# Altium PCB HandHeld_Terminal_V2.PcbDoc (part 2 of 2)
Units mil, origin at the board's own origin, x right, y up, seen from the top; angles counter-clockwise.
Board outline 1653.54 x 2401.57 mil, 4 copper layers (Top Layer, GND_02, PWR_03, Bottom Layer), stack 23.756 mil thick; 120 components, 79 nets, 410 pads, 246 vias.
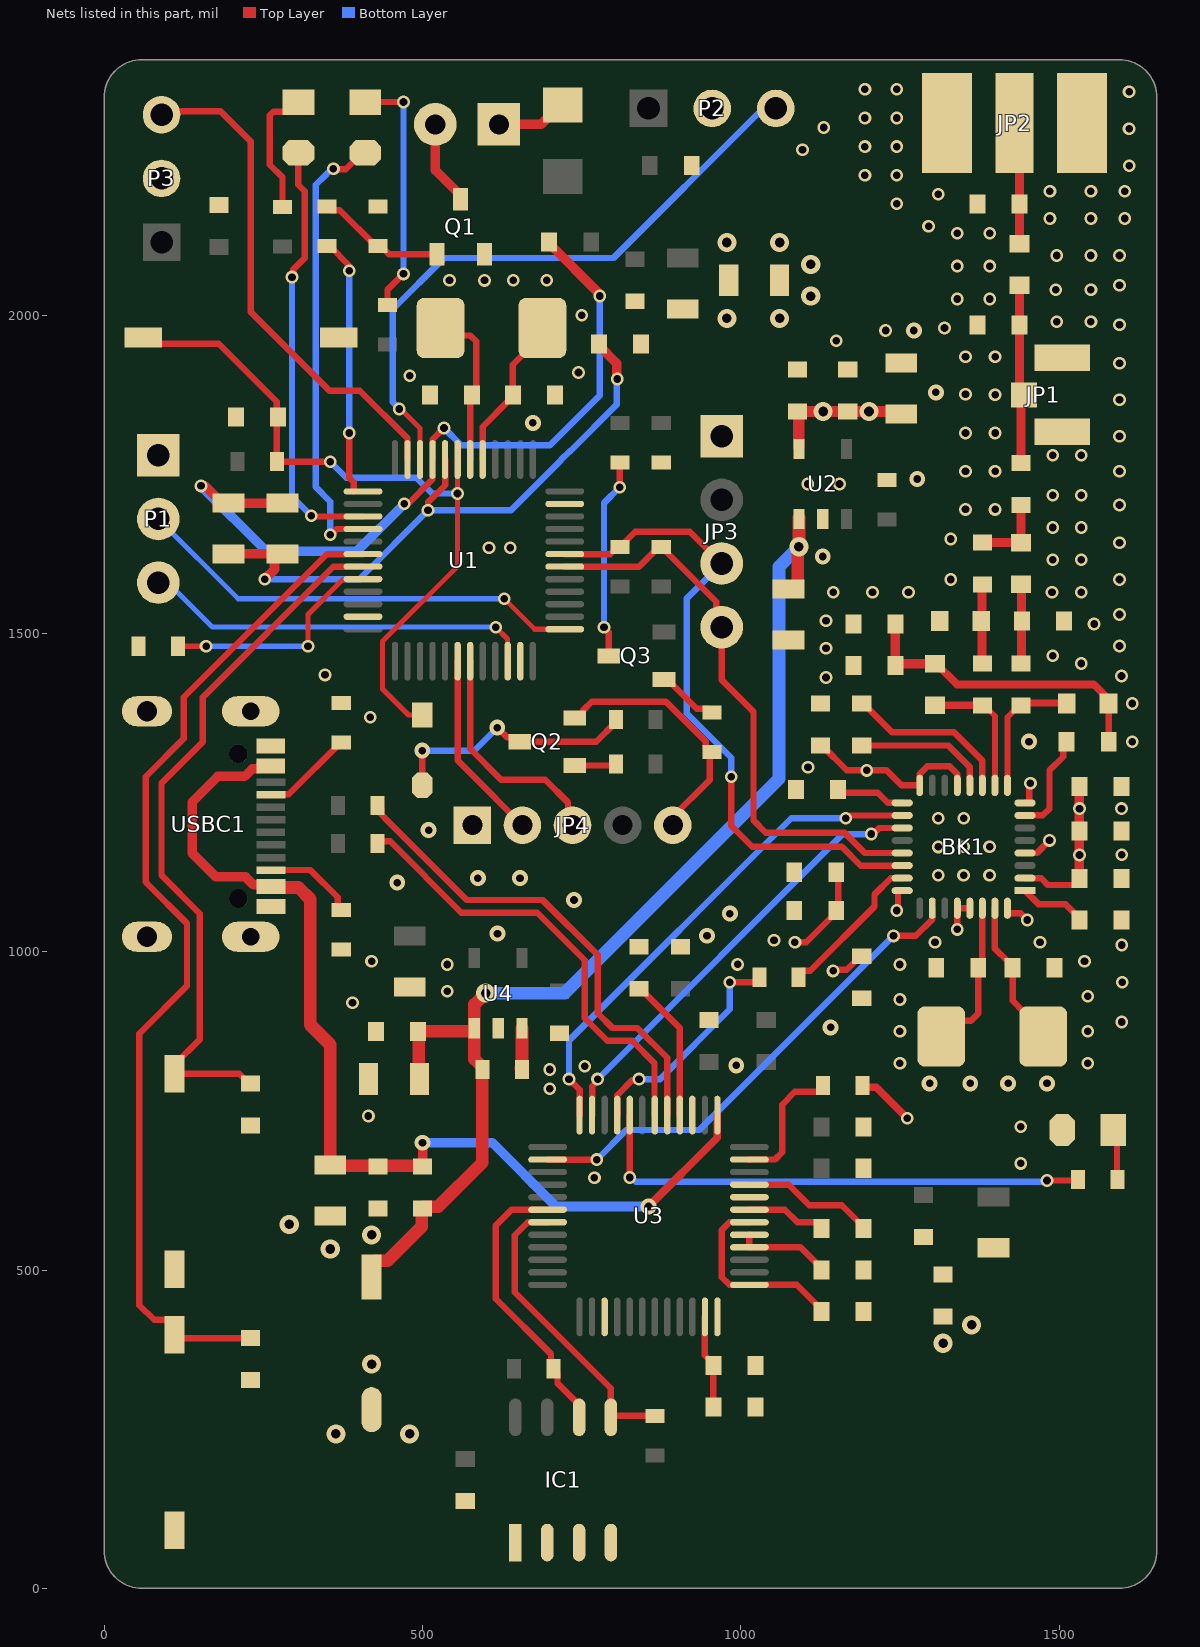
[diagram p4: the nets of this part, all layers, seen from the top]

## Via types
v1: diameter 20, hole 12, Top Layer to Bottom Layer, tented both sides, 201 vias
v2: diameter 25, hole 12, Top Layer to Bottom Layer, tented both sides, 27 vias
v3: diameter 30, hole 15, Top Layer to Bottom Layer, tented both sides, 18 vias

## Nets (pads, with @x,y where several pads share a name; then routed paths per layer and width w, separated by ;. In a path a pad name is that pad's centre, name@x,y a point inside that pad or via, vN(x,y) a via of type N, cw(c..) or ccw(c..) an arc to the next point about the centre after c; other vN are vias at no path point) (continued)
GND: C1.1 C4.1 C11.1 C12.1 C25.1 C26.1 C27.1 C28.1 C29.1 C37.1 C40.2 C41.2 C43.1 C45.1 C49.2 C50.2 C51.2 C52.2 C53.1 C58.1 FB3.1 FB5.1 FB7.1 IC1.1 IC1.2 IC1.3 IC1.4 JP3.1 JP4.1 LED4.2 P1.1 P2.2 P3.2 Q1.2 R3.2 R7.1 R9.2 R18.2 R19.2 R20.1 SW1.2 SW2.2 SW3.1 U1.23 U1.35 U1.47 U3.3 U4.2 USBC1.0 USBC1.A1 USBC1.A12 USBC1.B1 USBC1.B12 | length 91.7
  Top Layer w12: R19.2@1191,790 1193.97,787.03 1212.97,787.03 v1(1261.41,738.59)
  other v1: 770,645 1440,667.59 1440,725 415,742 700,784.74 700,815 755,820 390,920 538.88,937.95 538.88,980 994.99,980.2 420,985 417.76,1368.29 346.69,1435 604.37,1634.68 637.83,1634.68 480,1905 745,1910 750,2000 542.41,2055 597.4,2054.8 642.45,2055 695,2055
  other v2: 992.8,821.58 947,1025.2 617.71,1028.58 982.74,1060 738,1081.42 460.31,1108.77 586.87,1115.73 653.18,1115.73 509.58,1191.14 673.27,1831
  other v3: 363.84,242.62 479.65,242.62 420,352.13 1317.75,385 1362.75,413.93 355,533.12 420,555.22 290.58,571.73 978.28,1995 978.28,2114.35
GNDA: C38.1 C39.1 C44.1 C46.1 C47.1 C48.1 C54.1 C55.1 FB7.2 U3.27 U3.36 U3.44
GNDRF: "BK1. " C2.1 C3.1 C5.1 C6.1 C7.1 C8.1 C17.2 C18.2 C19.2 C20.2 C21.2 C23.1 C24.2 C32.1 C33.1 C34.1 C35.2 C36.2 C56.2 C57.1 FB5.2 JP1.2 JP1.3 JP2.2 JP2.3 L5.1 R14.1 U2.2
  other v1: 1250,825 1545,825 1250,875 1545,875 1598.5,889.76 1250,925 1545,930 1599.37,952 1250,980 1540,985 1598.5,1010.77 1305,1015 1470,1015 1052.13,1018.12 1309.99,1120.21 1350,1120.21 1390.88,1120.21 1598.5,1152.5 1309.99,1164.8 1350,1165 1390.88,1165 1310.33,1210 1350.35,1210 1598,1225 1105.49,1290 1615,1330.16 1615,1390 1133.78,1430.9 1598,1433.25 1535,1453 1490,1465 1133.78,1476.82 1595,1480.5 1555,1515 1133.78,1520 1595,1530 1145.15,1565 1207,1565 1263.5,1565 1488.8,1565 1535,1565 1330,1585 1595,1585 1490,1615.75 1535,1615.75 1595,1642.84 1330,1648.58 1490,1666.5 1535,1666.5 1353,1695 1399.5,1695 1595,1702 1490,1717.25 1535,1717.25 1105,1735 1155,1735 1353,1755 1399.5,1755 1595,1755 1490,1780 1535,1780 1595,1810 1353,1815 1399.5,1815 1595,1867.23 1399.5,1875.26 1353,1876.08 1595,1924.45 1353,1935 1399.5,1935 1150,1960 1227.46,1976 1320,1980 1595,1985 1496.29,1990 1550,1990 1340,2025.54 1391.18,2025.54 1495,2040 1550,2040 1595,2047.32 1340,2077.27 1391.18,2077.27 1496.29,2094 1550,2094 1595,2094 1340,2129 1391.18,2129 1295,2140 1485.63,2152 1550,2152 1603.27,2152 1245,2175 1310,2190 1485.63,2195 1550,2195 1603.27,2195 1195,2219.98 1245,2220.01 1610.24,2235 1096.93,2260 1195,2264.99 1245,2265.01 1610,2293.14 1130.41,2294.97 1195,2309.99 1245,2310.02 1610,2351.28 1195,2355 1245,2355.03
  other v2: 1296.57,793.25 1360.5,793.25 1420,793.25 1481.13,793.25 1141.18,881.24 1452.7,1330.16 1128.78,1621.12 1277.15,1742.87 1306.35,1878.96 1271.83,1976
  other v3: 1061,1995 1109.92,2030 1109.92,2080 1061,2114.35
LED1: LED2.2 U1.15 | length 676.8
  Top Layer w10: v1(295,2060) 296.91,2061.91 296.91,2071.91 315,2090 315,2195 305,2205 LED2.2@305,2255 ; v1(325,1685) 326.02,1683.98 406.46,1683.98 U1.15@406.54,1683.9
  Bottom Layer w10: v1(295,2060) 295,1715 v1(325,1685)
LED3: LED3.2 U1.16 | length 714.1
  Top Layer w10: v1(355,1655) 356.26,1655 365.48,1664.21 U1.16@406.54,1664.21 ; v1(360,2230) 360.61,2229.39 379.39,2229.39 405,2255 LED3.2@410,2255
  Bottom Layer w10: v1(355,1655) 355,1707.12 332,1730.12 332,2205 340.94,2213.94 341.24,2213.94 357.29,2230 v1(360,2230)
NetBK1_1: BK1.1 C7.2 | length 106.1
  Top Layer w10: BK1.1@1446.5,1096.08 1467.58,1075 1509.5,1075 1532,1052.5 C7.2@1532,1050
NetBK1_7: BK1.7 FB1.2 | length 159.1
  Top Layer w10: BK1.7@1446.5,1214.22 1446.66,1214.38 1474.38,1214.38 1485,1225 1485,1285 1506.64,1306.64 1506.64,1324.64 FB1.2@1512,1330
NetBK1_9: BK1.9 C10.1 L1.1 | length 211.3
  Top Layer w9: BK1.9@1418.91,1261.5 1418.91,1368.41 C10.1@1437.5,1387
  Top Layer w11: C10.1@1437.5,1387 C10.1@1440,1387 1444,1391 1508.32,1391 L1.1@1512.32,1395
NetBK1_10: BK1.10 C16.1 L2.1 | length 210.1
  Top Layer w9: C16.1@1382.5,1387 1399.23,1370.28 BK1.10@1399.23,1261.5
  Top Layer w11: L2.1@1305,1387.32 L2.1@1305.16,1387.16 ; C16.1@1379.84,1387.16 C16.1@1380,1387 C16.1@1382.5,1387
  Top Layer w12: L2.1@1305.16,1387.16 C16.1@1379.84,1387.16
NetBK1_11: BK1.11 C22.1 | length 265.6
  Top Layer w10: C22.1@1190,1390.13 1192.5,1390.13 1237.63,1345 1335,1345 1379.38,1300.62 1379.38,1261.66 BK1.11@1379.54,1261.5
NetBK1_12: BK1.12 C22.2 | length 212.6
  Top Layer w10: C22.2@1190,1324.13 1325.87,1324.13 1359.69,1290.31 1359.69,1261.66 BK1.12@1359.85,1261.5
NetBK1_17: BK1.17 C33.2 | length 97.2
  Top Layer w10: C33.2@1163,1250 1215,1250 1231.09,1233.91 BK1.17@1253.5,1233.91
NetBK1_30: BK1.30 C21.1 Y1.2 | length 237.7
  Top Layer w10: Y1.2@1315,865 1341.64,891.64 1361.64,891.64 1373,903 C21.1@1373,975 ; Y1.2@1339.79,876.27 Y1.2@1341.25,876.94 ; C21.1@1375,980 1379.38,984.38 1379.38,1068.34 BK1.30@1379.54,1068.5
NetBK1_31: BK1.31 C20.1 Y1.1 | length 174.6
  Top Layer w10: BK1.31@1399.23,1068.5 1399.23,1005.28 1420,984.5 C20.1@1420,980 ; C20.1@1427,975 1427,923 Y1.1@1445,905
NetC1_2: C1.2 SW1.1 U1.18 | length 1615.7
  Top Layer w10: C1.2@230,393 115.54,393 SW1.1@110,398.54 110,409.98 98.25,421.73 78.27,421.73 55,445 55,871.42 130,946.42 130,1044.54 67,1107.54 67,1108 65,1110 65,1275 125,1335 125,1400 349.49,1624.49 406.18,1624.49 U1.18@406.54,1624.84
NetC2_2: C2.2 C3.2 FB1.1 L1.2 L2.2 | length 490.8
  Top Layer w10: C2.2@1243,1450 C2.2@1245.68,1452.68 ; L2.2@1305,1452.68 L2.2@1306.97,1452.68 ; L1.2@1577.84,1396.81 1577.84,1330.16 FB1.1@1578,1330
  Top Layer w12: L2.2@1306.97,1452.68 1339.65,1420 1554.65,1420 L1.2@1577.84,1396.81
  Top Layer w15: C2.2@1243,1450 C3.2@1243,1514.8 ; C2.2@1245.68,1452.68 L2.2@1305,1452.68
NetC4_2: C4.2 SW2.1 U1.19 | length 1122.8
  Top Layer w10: C4.2@230,793 227.5,793 211.96,808.54 SW2.1@110,808.54 110,822.32 150,862.32 150,1060 90,1120 90,1265 155,1330 155,1400 359.8,1604.8 406.18,1604.8 U1.19@406.54,1605.16
NetC8_2: C8.2 C10.2 L4.2 | length 126
  Top Layer w11: C10.2@1440,1453 C10.2@1441,1454 ; L4.2@1440,1577.32 L4.2@1441,1576.32 ; C8.2@1441,1519 C8.2@1442,1520 C8.2@1441,1521
  Top Layer w14: C10.2@1441,1454 C8.2@1441,1519 ; C8.2@1441,1521 L4.2@1441,1576.32
NetC9_1: C9.1 C15.2 L4.1 | length 119.5
  Top Layer w11: C15.2@1380,1643 C15.2@1380.16,1642.84 ; L4.1@1439.84,1642.84 L4.1@1440,1642.68
  Top Layer w14: C15.2@1380.16,1642.84 L4.1@1439.84,1642.84 ; L4.1@1440,1642.68 C9.1@1440,1702
NetC9_2: C9.2 C18.1 JP1.1 L3.2 | length 294.2
  Top Layer w11: JP1.1@1440,1870.04 JP1.1@1444.96,1875 ; JP1.1@1453,1886.96 JP1.1@1460,1879.96
  Top Layer w14: JP1.1@1438,1881.96 L3.2@1438,2047.32 ; C9.2@1440,1768 JP1.1@1440,1870.04
  Top Layer w15: JP1.1@1438,1881.96 JP1.1@1444.96,1875
NetC15_1: C15.1 C16.2 L5.2 | length 125.9
  Top Layer w11: C16.2@1378.84,1454.16 C16.2@1380,1453 ; L5.2@1378.84,1518.84 L5.2@1377.68,1520 L5.2@1378.84,1521.16 ; C15.1@1378.84,1575.84 C15.1@1380,1577
  Top Layer w14: C16.2@1378.84,1454.16 L5.2@1378.84,1518.84 ; L5.2@1378.84,1521.16 C15.1@1378.84,1575.84
NetC17_1: C17.1 JP2.1 L3.1 | length 193.5
  Top Layer w14: L3.1@1438,2114.68 JP2.1@1438,2294
  Top Layer w15: JP2.1@1430,2302 JP2.1@1438,2294 ; L3.1@1438,2114.68 L3.1@1440,2112.68
NetC25_2: C25.2 U1.5 Y2.2 | length 237.5
  Top Layer w10: U1.5@594.53,1773.46 594.53,1825.03 635,1865.5 C25.2@635,1870 ; C25.2@642,1875 642,1922 688.33,1968.33 Y2.2@688.33,1980
NetC29_2: C29.2 U1.6 Y2.1 | length 251.3
  Top Layer w10: Y2.1@528.33,1980 540,1968.33 574.97,1968.33 584.3,1959 584.3,1885 578,1877.5 C29.2@578,1875 ; U1.6@574.84,1773.46 574.84,1869.34 C29.2@578,1872.5
NetC42_1: C42.1 U3.43 | length 127.4
  Top Layer w10: U3.43@1013.46,594.84 1069.32,594.84 1089.16,575 1119.5,575 1127,567.5 C42.1@1127,565
NetC42_2: C42.2 U3.45 | length 209.7
  Top Layer w10: U3.45@1013.46,634.21 1075.4,634.21 1107.62,602 1158.5,602 1193,567.5 C42.2@1193,565
NetC44_2: C44.2 U3.37 U3.42 | length 303.4
  Top Layer w10: U3.42@1013.46,575.16 1013.39,575.08 982.14,575.08 969.95,562.9 969.95,488.99 982.14,476.81 1013.39,476.81 U3.37@1013.46,476.73 1087.77,476.73 1127,437.5 C44.2@1127,435
NetC45_2: C45.2 U3.4 | length 226.6
  Top Layer w10: C45.2@840,942 842.5,942 904.21,880.29 U3.4@904.21,743.46
NetC46_2: C46.2 U3.40 U3.41 | length 149.5
  Top Layer w10: U3.41@1013.46,555.47 U3.40@1013.46,535.79 1033.15,535.79 1093.71,535.79 1127,502.5 C46.2@1127,500
NetC47_2: C47.2 C48.2 U3.35 | length 147.1
  Top Layer w10: U3.35@943.58,426.54 943.58,365.92 957,352.5 C48.2@957,350 C47.2@957,285
NetD1_2: D1.2 Q2.3 R11.2 | length 393.5
  Top Layer w10: D1.2@499.58,1261.63 v2@499.58,1309.75 ; v2(617.32,1352.18) 632.69,1336.81 645.94,1336.81 Q2.3@652.76,1330 773,1330 804,1361 R11.2@804,1365
  Bottom Layer w10: v2(499.58,1316.08) 581.22,1316.08 v2(617.32,1352.18)
NetIC1_5: IC1.5 R27.1 U3.19 | length 478.6
  Top Layer w10: U3.19@696.54,575.16 696.46,575.08 665.21,575.08 645,554.87 645,465 795.91,314.09 IC1.5@795.91,268.74 798.17,271 R27.1@865,271
NetIC1_6: IC1.6 R26.1 U3.18 | length 447.3
  Top Layer w10: U3.18@696.54,594.84 696.46,594.76 639.76,594.76 615,570 615,455 701.89,368.11 701.89,349.11 712,339 712,322.33 745.91,288.43 IC1.6@745.91,268.74
NetLED1_1: LED1.1 R1.1 | length 112.5
  Top Layer w10: R1.1@716.5,2330.12 R1.1@720,2330.12
  Top Layer w15: LED1.1@620,2300 686.38,2300 R1.1@716.5,2330.12
NetLED1_2: LED1.2 Q1.3 | length 134.3
  Top Layer w10: Q1.3@560,2182.24 Q1.3@560,2188.15
  Top Layer w15: LED1.2@520,2300 520,2228.15 Q1.3@560,2188.15
NetLED2_1: LED2.1 R2.1 | length 206.1
  Top Layer w10: R2.1@280,2170 280,2216.69 260,2236.69 260,2314.14 265.86,2320 290,2320 LED2.1@305,2335
NetLED3_1: LED3.1 R6.1 | length 389.4
  Top Layer w10: LED3.1@410,2335 v1(470,2335) ; R6.1@445,2016 445,2040 v1(470,2065)
  Bottom Layer w10: v1(470,2065) v1(470,2335)
NetLED4_1: LED4.1 R25.1 | length 63
  Top Layer w10: R25.1@1591,642 LED4.1@1591,705
NetQ1_1: Q1.1 R4.1 R7.2 | length 203.8
  Top Layer w10: R4.1@350,2171 356,2165 370,2165 426,2109 R7.2@430,2109 434,2109 447.37,2095.63 Q1.1@522.6,2095.63
NetQ2_1: Q2.1 R12.2 | length 65.6
  Top Layer w10: Q2.1@739.37,1292.6 801.6,1292.6 R12.2@804,1295
NetQ3_1: Q3.1 R13.2 | length 97
  Top Layer w10: Q3.1@879.37,1427.6 885.28,1427.6 930.87,1382 949,1382 R13.2@955,1376
NetQ3_3: Q3.3 R15.1 | length 317.6
  Top Layer w10: v1(785,1510) 792.76,1502.24 Q3.3@792.76,1465 ; v1(810,1730) R15.1@810,1769
  Bottom Layer w10: v1(785,1510) 785,1705 v1(810,1730)
NetR3_1: R3.1 U1.20 | length 363.5
  Top Layer w8: R3.1@116,1480 v1(160,1480) ; v1(320,1480) 320,1530 375.12,1585.12 406.18,1585.12 U1.20@406.54,1585.47
  Bottom Layer w8: v1(160,1480) v1(320,1480)
NetR4_2: R4.2 U1.13 | length 405.5
  Top Layer w10: R4.2@350,2109 354,2109 385,2078 v1(385,2070) ; v1(385,1815) 385,1744.58 392.17,1737.41 U1.13@392.17,1723.35
  Bottom Layer w10: v1(385,1815) v1(385,2070)
NetR18_1: R18.1 USBC1.B5 | length 145.1
  Top Layer w10: USBC1.B5@261.73,1128.44 323.67,1128.44 366.57,1085.55 366.57,1071.12 R18.1@372.28,1065.41
NetR19_1: R19.1 U3.47 | length 210
  Top Layer w10: U3.47@1013.46,673.58 1013.54,673.66 1053.66,673.66 1065,685 1065,760 1085,780 1123,780 1129,786 R19.1@1129,790
NetR20_2: R20.2 USBC1.A5 | length 144.4
  Top Layer w10: USBC1.A5@261.73,1246.55 262.52,1247.34 289.72,1247.34 R20.2@371.83,1329.45
NetR21_1: R21.1 U4.3 | length 67.5
  Top Layer w10: R21.1@649.78,815 649.78,819 R21.1@656.18,825.4
  Top Layer w20: R21.1@656.18,825.4 U4.3@656.18,879.88
NetR24_1: R24.1 U3.9 | length 357.1
  Top Layer w10: U3.9@805.79,743.46 805.87,743.54 805.87,774.79 829.16,798.09 838.09,798.09 v1(840,800) ; v1(982.74,952.13) 1023,952.13 1029,958.13 R24.1@1029,960
  Bottom Layer w10: v1(840,800) 873,800 982.74,909.74 v1(982.74,952.13)
NetR25_2: R25.2 U3.8 | length 805.8
  Top Layer w10: v1(825.47,645.47) U3.8@825.47,743.46 ; v1(1481.13,640.75) 1525.06,640.75 R25.2@1530.13,635.68
  Bottom Layer w10: v1(825.47,645.47) 828.18,645.47 834.82,638.83 1477.09,638.83 v1@1478.76,637.16
PA13: P1.3 U1.34 | length 626.5
  Top Layer w8: v1(615,1510) 633.55,1491.45 633.55,1456.89 U1.34@633.9,1456.54
  Bottom Layer w8: P1.3@85,1595 170,1510 v1(615,1510)
PA14: P1.2 U1.37 | length 710.2
  Top Layer w8: v1(628.22,1554.68) 676.17,1506.73 U1.37@723.46,1506.73
  Bottom Layer w8: P1.2@85,1680 210.32,1554.68 v1(628.22,1554.68)
pcm_lrck: BK1.18 U3.12 | length 794
  Top Layer w10: v1(730,800) 746.73,783.27 U3.12@746.73,743.46 ; v1(1165,1210) 1167.71,1210 1171.93,1214.22 BK1.18@1253.5,1214.22
  Bottom Layer w10: v1(730,800) 730.18,800.18 730.18,860.68 1079.5,1210 v1(1165,1210)
pcm_mclk: BK1.23 R24.2 | length 240.4
  Top Layer w10: R24.2@1091,960 1091,964 1097,970 1108.88,970 1210,1071.12 1210,1089.94 1235.67,1115.62 1253.34,1115.62 BK1.23@1253.5,1115.78
pcm_sck: BK1.19 U3.11 | length 702
  Top Layer w8: v1(1205,1185) v1@1208.25,1185
  Top Layer w10: U3.11@766.42,743.46 766.5,743.54 766.5,788.79 775,797.29 v1(775,800) ; v1@1208.25,1185 1217.78,1194.53 BK1.19@1253.5,1194.53
  Bottom Layer w10: v1(775,800) 1159.82,1184.82 1204.82,1184.82 v1(1205,1185)
pcm_sda: BK1.26 U3.14 | length 778.2
  Top Layer w10: U3.14@696.54,673.58 v1(773.58,673.58) ; v1(1240,1025) 1274.94,1025 1300.62,1050.67 1300.62,1068.34 BK1.26@1300.77,1068.5
  Bottom Layer w10: v1(773.58,673.58) 820,720 935,720 v1(1240,1025)
pwm1: P2.3 U1.10 | length 990.2
  Top Layer w8: v1(463.55,1852.79) 465.73,1852.79 495.75,1822.77 495.75,1773.82 U1.10@496.1,1773.46 ; P2.3@1053,2323 P2.3@1055,2325
  Bottom Layer w10: v1(463.55,1852.79) 463.55,1853.46 453.35,1863.65 453.35,2009.54 533.81,2090 800,2090 1025.61,2315.61 1045.61,2315.61 P2.3@1055,2325
pwm2: P3.3 U1.11 | length 791.6
  Top Layer w10: P3.3@90,2315 95.5,2320.5 182.5,2320.5 230,2273 230,2005.2 353.77,1881.42 401.58,1881.42 476.42,1806.58 U1.11@476.42,1773.46
RESET: C37.2 D1.1 R10.1 SW3.2 U1.7 | length 1141.2
  Top Layer w8: C37.2@271,1838 C37.2@273,1840 ; D1.1@499.58,1371.86 478.14,1371.86 437.05,1412.95 437.05,1487.72 555.16,1605.83 555.16,1720 U1.7@555.16,1773.46 U1.7@554.81,1773.82
  Top Layer w10: SW3.2@61.46,1965 71.46,1955 180,1955 270.86,1864.14 270.86,1842.14 C37.2@273,1840 ; C37.2@271,1838 R10.1@271,1770 v1(355,1770)
  Bottom Layer w10: v1(355,1770) 380,1745 490,1745 515,1720 v1(555,1720)
RF3V3: BK1.2 BK1.4 BK1.8 BK1.13 BK1.16 BK1.24 BK1.28 BK1.29 BK1.32 C5.2 C6.2 C19.1 C23.2 C24.1 C32.2 C34.2 C36.1 C56.1 C57.2 U2.5 | length 1139.8
  Top Layer w10: v1(1085,1015) 1103,1015 1143,1055 1145.5,1055 1153,1062.5 1153,1065 C32.2@1153,1125 ; C24.1@1125,1324.13 1127.5,1324.13 1166.63,1285 1228.89,1285 1252.39,1261.5 1280.7,1261.5 BK1.16@1281.08,1261.88 ; v1(1145,970) 1146.91,971.91 1166.41,971.91 1187.5,993 C23.2@1190,993 ; v1(1245,1065) 1246.91,1066.91 1246.91,1095.7 1247.3,1096.09 BK1.24@1253.5,1096.09 ; BK1.16@1281.08,1261.5 1281.24,1261.66 1281.24,1270 1281.24,1279.33 1293.15,1291.23 1328.09,1291.23 1340,1279.33 1340,1261.66 BK1.13@1340.15,1261.5 ; v1(1340.15,1035.16) BK1.28@1340.15,1068.5 BK1.29@1359.85,1068.5 ; BK1.32@1418.91,1068.5 1418.91,1061.05 1419.3,1060.67 1439.33,1060.67 v1(1450,1050) ; BK1.2@1446.5,1115.78 1446.66,1115.62 1471.86,1115.62 1482.47,1105 C19.1@1525,1105 ; BK1.4@1446.5,1155.16 1446.66,1155.31 1465.31,1155.31 v1(1485,1175) ; BK1.8@1446.5,1233.91 1452.7,1233.91 1453.09,1234.3 1453.09,1263.09 v1(1455,1265)
  Top Layer w15: C57.2@1089.27,1848.85 C57.2@1089.38,1848.96 ; C57.2@1089.48,1847.07 1089.38,1846.96 C57.2@1089.98,1846.36 ; U2.5@1091.38,1790.12 1091.38,1793.21 U2.5@1092.74,1794.57 ; v1@1530.96,1154.04 1530.96,1152.5 1532,1151.46 C19.1@1532,1120 ; v1@1532,1158.35 C5.2@1532,1265
  Top Layer w18: C57.2@1090.89,1848.85 v3(1129.42,1848.85) 1167.96,1848.85 v3(1201.43,1848.85) C36.1@1234.89,1848.85 ; U2.5@1091.38,1793.21 C57.2@1091.38,1848.15
  other v1: 1532,1152 1532,1225 1197.87,1285
RTS: JP4.5 Q2.2 R13.1 | length 404.7
  Top Layer w10: Q2.2@739.37,1367.4 745.28,1367.4 752.09,1374.21 752.09,1379.14 765.94,1393 882.38,1393 895,1380.38 945,1330.38 945,1320 R13.1@951,1314 ; JP4.5@893.15,1198.86 893.15,1212.14 951,1269.99 951,1310 R13.1@955,1314
RX: JP4.3 U1.31 | length 364.9
  Top Layer w10: U1.31@574.84,1456.54 574.84,1318.89 623.18,1270.55 692.52,1270.55 728.45,1234.62 728.45,1206.08 JP4.3@735.67,1198.86
SCK: BK1.21 JP3.4 R5.2 U1.42 | length 911
  Top Layer w10: U1.42@723.46,1605.16 840.16,1605.16 871,1636 879,1636 885,1630 885,1626 961.23,1549.77 961.23,1518.77 JP3.4@970,1510 970,1427 1020,1377 1020,1206.42 1039.42,1187 1163,1187 1194.85,1155.16 BK1.21@1253.5,1155.16
SDA: BK1.22 JP3.3 R8.2 U1.43 | length 1042.3
  Top Layer w10: U1.43@723.46,1624.84 794.84,1624.84 806,1636 R8.2@810,1636 814,1636 820,1642 820,1646 834,1660 920,1660 JP3.3@970,1610 ; v1(985,1275) 985,1198 1018,1165 1158.88,1165 1188.42,1135.47 BK1.22@1253.5,1135.47
  Bottom Layer w10: JP3.3@970,1610 915,1555 915,1375 985,1305 v1(985,1275)
TX: JP4.2 U1.30 | length 299.8
  Top Layer w10: U1.30@555.16,1456.54 555.16,1300.63 575.67,1280.12 JP4.2@656.93,1198.86
UD_N: R23.1 U3.6 | length 716.1
  Top Layer w10: R23.1@428.87,1170 432.31,1173.44 449.01,1173.44 561.03,1061.42 680.3,1061.42 755,986.72 755,895.43 790.14,860.29 829.25,860.29 864.53,825.01 U3.6@864.53,743.78
UD_P: R22.2 U3.5 | length 768
  Top Layer w10: R22.2@428.87,1230 434.87,1224 434.87,1215.86 444.87,1205.86 569.31,1081.42 688.58,1081.42 775,995 775,903.72 798.43,880.29 837.53,880.29 884.53,833.29 U3.5@884.53,743.46
USB_5V: C26.2 C35.1 C50.1 C51.1 FB4.1 R21.2 U2.1 U4.1 | length 1820
  Top Layer w20: C50.1@420,489.33 420,509.02 425.75,514.76 445.43,514.76 498.87,568.2 498.87,595.87 502.5,599.5 524.5,599.5 594,669 R21.2@594,815 594,819 581.38,831.62 U4.1@581.38,879.88 581.38,917.28 v3(599.09,935) ; C26.2@494,800 494,874 C51.1@493,875 U4.1@580.24,875 ; C35.1@1075,1570 1084.46,1570 1089.46,1575 1089.46,1634.46 v3(1091.38,1636.38) U2.1@1091.38,1679.88 U2.1@1091.38,1682.43
  Bottom Layer w20: v3(599.09,935) 723.04,935 1060,1271.96 1060,1605 v3(1091.38,1636.38)
VBUS: C27.2 C28.2 FB4.2 U3.1 USBC1.A4 USBC1.A9 USBC1.B4 USBC1.B9 | length 1603
  Top Layer w10: U3.1@963.19,743.39 U3.1@963.27,743.46
  Top Layer w12: v2(855,599.88) 963.19,708.07 U3.1@963.19,743.39
  Top Layer w15: USBC1.B9@244.26,1291.38 240.52,1287.64 232.71,1287.64 220.82,1275.76 178.63,1275.76 137.87,1235 137.87,1155 175.31,1117.57 222.14,1117.57 234.71,1105 USBC1.B4@248,1105 ; C27.2@355,660 C27.2@356.5,661.5 ; C27.2@355,665 C27.2@356,664 ; FB4.2@499,664 FB4.2@500,663 v2(500,700)
  Top Layer w20: USBC1.A9@269.33,1101.17 305.11,1101.17 323.67,1082.6 323.67,885.32 355,854 C27.2@355,665 ; C27.2@356,664 FB4.2@499,664
  Bottom Layer w15: v2(500,700) 609.75,700 709.87,599.88 v2(855,599.88)
VDDA: C13.2 C14.2 FB2.2 U1.9 | length 1242.2
  Top Layer w10: v1(471.38,1703.96) 477.53,1703.96 515.71,1742.14 515.71,1773.39 515.87,1773.54 515.87,1805.06 v1(533.79,1822.98)
  Top Layer w15: v1(152,1731.93) 158.07,1731.93 185,1705 C14.2@195,1705 C13.2@280,1705 ; FB2.2@699,2115 699,2112.5 778.33,2033.17 v1(778.33,2030.32)
  Bottom Layer w10: v1(533.79,1822.98) 560.82,1795.95 700.27,1795.95 778.33,1874 v1(778.33,2030.32)
  Bottom Layer w15: v1(152,1731.93) 254.43,1629.5 396.92,1629.5 v1(471.38,1703.96)
VSSA: C13.1 C14.1 FB3.2 U1.8 | length 996.2
  Top Layer w10: v1(508.58,1693.74) 508.58,1706.11 535.47,1733 U1.8@535.47,1773.46
  Top Layer w15: C14.1@195,1625 C13.1@280,1625 ; v1(252,1585.47) 267.43,1600.9 267.43,1622.43 C13.1@269.16,1624.16 ; FB3.2@777,1955 777,1952.5 804.79,1924.71 804.79,1900.95 v1(805.75,1900)
  Bottom Layer w10: v1(252,1585.47) 400.31,1585.47 v1(508.58,1693.74) 639.01,1693.74 717.56,1772.29 717.56,1773.11 731.03,1786.58 731.85,1786.58 805.19,1859.92 805.19,1899.44 v1(805.75,1900)
pads on no net: BK1.5 BK1.6 BK1.14 BK1.15 BK1.20 BK1.25 BK1.27 IC1.7 U1.2 U1.3 U1.4 U1.12 U1.14 U1.17 U1.21 U1.22 U1.25 U1.26 U1.27 U1.28 U1.29 U1.32 U1.38 U1.39 U1.40 U1.41 U1.45 U1.46 U2.4 U3.7 U3.10 U3.13 U3.15 U3.16 U3.17 U3.20 U3.21 U3.22 U3.23 U3.24 U3.25 U3.26 U3.28 U3.29 U3.30 U3.31 U3.32 U3.33 U3.38 U3.39 U3.48 U4.4 USBC1. USBC1.A8 USBC1.B8

## Polygon pours and split planes (outlines as drawn)
GND on Bottom Layer "NONET_L02_P-001" (solid, pour order 5): 0,2400 1163.74,2400 1011.89,2248.15 1011.87,2248.13 ccw(c1019.99,2240.01) 1008.5,2240 1008.5,955 ccw(c1020,955) 1011.87,946.87 1011.89,946.85 1203.74,755 1569.23,755 1650,835.77 1650,0 0,0
GNDRF on Bottom Layer "NONET_L02_P-001" (solid, pour order 6): 1031.5,959.76 1031.5,2235.24 1184.76,2388.5 1603.27,2388.5 1643.5,2348.27 1643.5,858.6 1559.9,775 1216.26,775
GND on Top Layer "NONET_L02_P-001" (solid, pour order 7): 0.8,2401.6 1162.46,2401.6 1012.5,2251.64 1012.5,951 ccw(c1023.99,950.99) 1015.87,942.87 1203.73,755 1568.39,755 1650.8,835.9 1650.8,1.6 0.8,1.6
GNDRF on Top Layer "NONET_L02_P-001" (solid, pour order 8): 1030,961.26 1030,2233.74 1184.76,2388.5 1610.24,2388.5 1643.5,2355.24 1643.5,858.6 1559.9,775 1216.26,775
GNDA on Top Layer "NONET_L02_P-001" (solid, pour order 4): 1282.41,465 1072.41,255 905,255 775,385 775,490 1045,760 1325,760 1450,635 1450,510 1405,465
RF3V3 on PWR_03 (split plane): 1599.58,2381.22 1604.59,2380.23 1609.43,2378.59 1614.01,2376.33 1618.25,2373.49 1622.09,2370.12 1625.46,2366.29 1628.3,2362.04 1630.56,2357.46 1632.2,2352.62 1633.19,2347.62 1633.49,2343.01 1633.45,2342.52 1633.45,848.44 1559.5,774.49 1214.77,774.49 1030.09,959.18 1030.09,2235.82 1175.74,2381.48 1594.49,2381.48 1594.98,2381.53
3V3 on PWR_03 (split plane): 59.06,2381.48 1147.21,2381.48 1012.87,2247.13 1011.27,2245.04 1010.26,2242.61 1009.91,2240 1009.91,955 1010.26,952.39 1011.27,949.96 1012.87,947.87 1203.46,757.27 1205.55,755.67 1206.26,755.38 1207.98,754.66 1210.59,754.32 1563.68,754.32 1566.29,754.66 1568.72,755.67 1570.81,757.27 1633.45,819.91 1633.45,59.06 1633.49,58.57 1633.19,53.96 1632.2,48.95 1630.56,44.12 1628.3,39.54 1625.46,35.29 1622.09,31.45 1618.25,28.08 1614.01,25.25 1609.43,22.99 1604.59,21.35 1599.58,20.35 1594.98,20.05 1594.49,20.1 59.06,20.1 58.56,20.05 53.96,20.35 48.95,21.35 44.12,22.99 39.54,25.25 35.29,28.08 31.45,31.45 28.08,35.29 25.25,39.54 22.99,44.12 21.35,48.95 20.35,53.96 20.05,58.57 20.1,59.06 20.1,2342.52 20.05,2343.01 20.35,2347.62 21.35,2352.62 22.99,2357.46 25.25,2362.04 28.08,2366.29 31.45,2370.12 35.29,2373.49 39.54,2376.33 44.12,2378.59 48.95,2380.23 53.96,2381.22 58.56,2381.53
GNDRF on GND_02 (split plane): 1599.58,2381.22 1604.59,2380.23 1609.43,2378.59 1614.01,2376.33 1618.25,2373.49 1622.09,2370.12 1625.46,2366.29 1628.3,2362.04 1630.56,2357.46 1632.2,2352.62 1633.19,2347.62 1633.49,2343.01 1633.45,2342.52 1633.45,848.44 1559.5,774.49 1214.77,774.49 1030.09,959.18 1030.09,2235.82 1175.74,2381.48 1594.49,2381.48 1594.98,2381.53
GND on GND_02 (split plane): 59.06,2381.48 1147.21,2381.48 1012.87,2247.13 1011.26,2245.04 1010.26,2242.61 1009.91,2240 1009.91,955 1010.26,952.39 1011.27,949.96 1012.87,947.87 1203.46,757.27 1205.55,755.67 1206.26,755.38 1207.98,754.66 1210.59,754.32 1563.68,754.32 1566.29,754.66 1568.72,755.67 1570.81,757.27 1633.45,819.91 1633.45,59.06 1633.49,58.57 1633.19,53.96 1632.2,48.95 1630.56,44.12 1628.3,39.54 1625.46,35.29 1622.09,31.45 1618.25,28.08 1614.01,25.25 1609.43,22.99 1604.59,21.35 1599.58,20.35 1594.98,20.05 1594.49,20.1 59.06,20.1 58.56,20.05 53.96,20.35 48.95,21.35 44.12,22.99 39.54,25.25 35.29,28.08 31.45,31.45 28.08,35.29 25.25,39.54 22.99,44.12 21.35,48.95 20.35,53.96 20.05,58.57 20.1,59.06 20.1,2342.52 20.05,2343.01 20.35,2347.62 21.35,2352.62 22.99,2357.46 25.25,2362.04 28.08,2366.29 31.45,2370.12 35.29,2373.49 39.54,2376.33 44.12,2378.59 48.95,2380.23 53.96,2381.22 58.56,2381.53

## Keep-outs
Keep-Out Layer:
  the board outline again, w10

## Other copper
GND_02 (plane layer: these items are gaps in the copper):
  lines w15: 1615,2400 1655,2360 1655,855.73
  lines w20: 1615,2400 1530,2400 1180,2400 1020,2240 1020,955 1210.59,764.41 1563.68,764.41 1655,855.73
  lines w40: 0,59.06 ccw(c59.06,59.06) 59.06,0 1594.49,0 ccw(c1594.49,59.06) 1653.54,59.06 1653.54,2342.52 ccw(c1594.49,2342.52) 1594.49,2401.57 59.06,2401.57 ccw(c59.06,2342.52) 0,2342.52 0,59.06
PWR_03 (plane layer: these items are gaps in the copper):
  lines w15: 1615,2400 1650,2365
  lines w20: 1615,2400 1180,2400 1020,2240 1020,955 1210.59,764.41 1563.68,764.41 1650,850.73 1650,2365
  lines w40: 0,59.06 ccw(c59.06,59.06) 59.06,0 1594.49,0 ccw(c1594.49,59.06) 1653.54,59.06 1653.54,2342.52 ccw(c1594.49,2342.52) 1594.49,2401.57 59.06,2401.57 ccw(c59.06,2342.52) 0,2342.52 0,59.06

## Silkscreen, mask and mechanical layers (free items; w line width, h text height)
Top Overlay:
  text "RST" at 41,1841 h40
  text "SW++" at 41,871 h40
  text "HT 230628" at 1198.03,75.04 h40
  text "SW--" at 161,61 h40
Mechanical 1:
  the board outline again, w10

## Text inside footprints (layer, text, board x,y; h text height)
Q1: Mechanical 1 "U1" at 576.31,2149.17 h23.62 r180
Q2: Mechanical 1 "U1" at 685.83,1346.31 h23.62 r270
Q3: Mechanical 1 "U1" at 825.83,1481.31 h23.62 r270